# Altium PCB ESP-Now transceiver.PcbDoc
Units mm, origin at the board's own origin, x right, y up, seen from the top; angles counter-clockwise.
Board outline 65.02 x 100 mm, 2 copper layers (Top Layer, Bottom Layer); 54 components, 46 nets, 224 pads, 89 vias.
Unrouted connection lines stored in the file: 1.
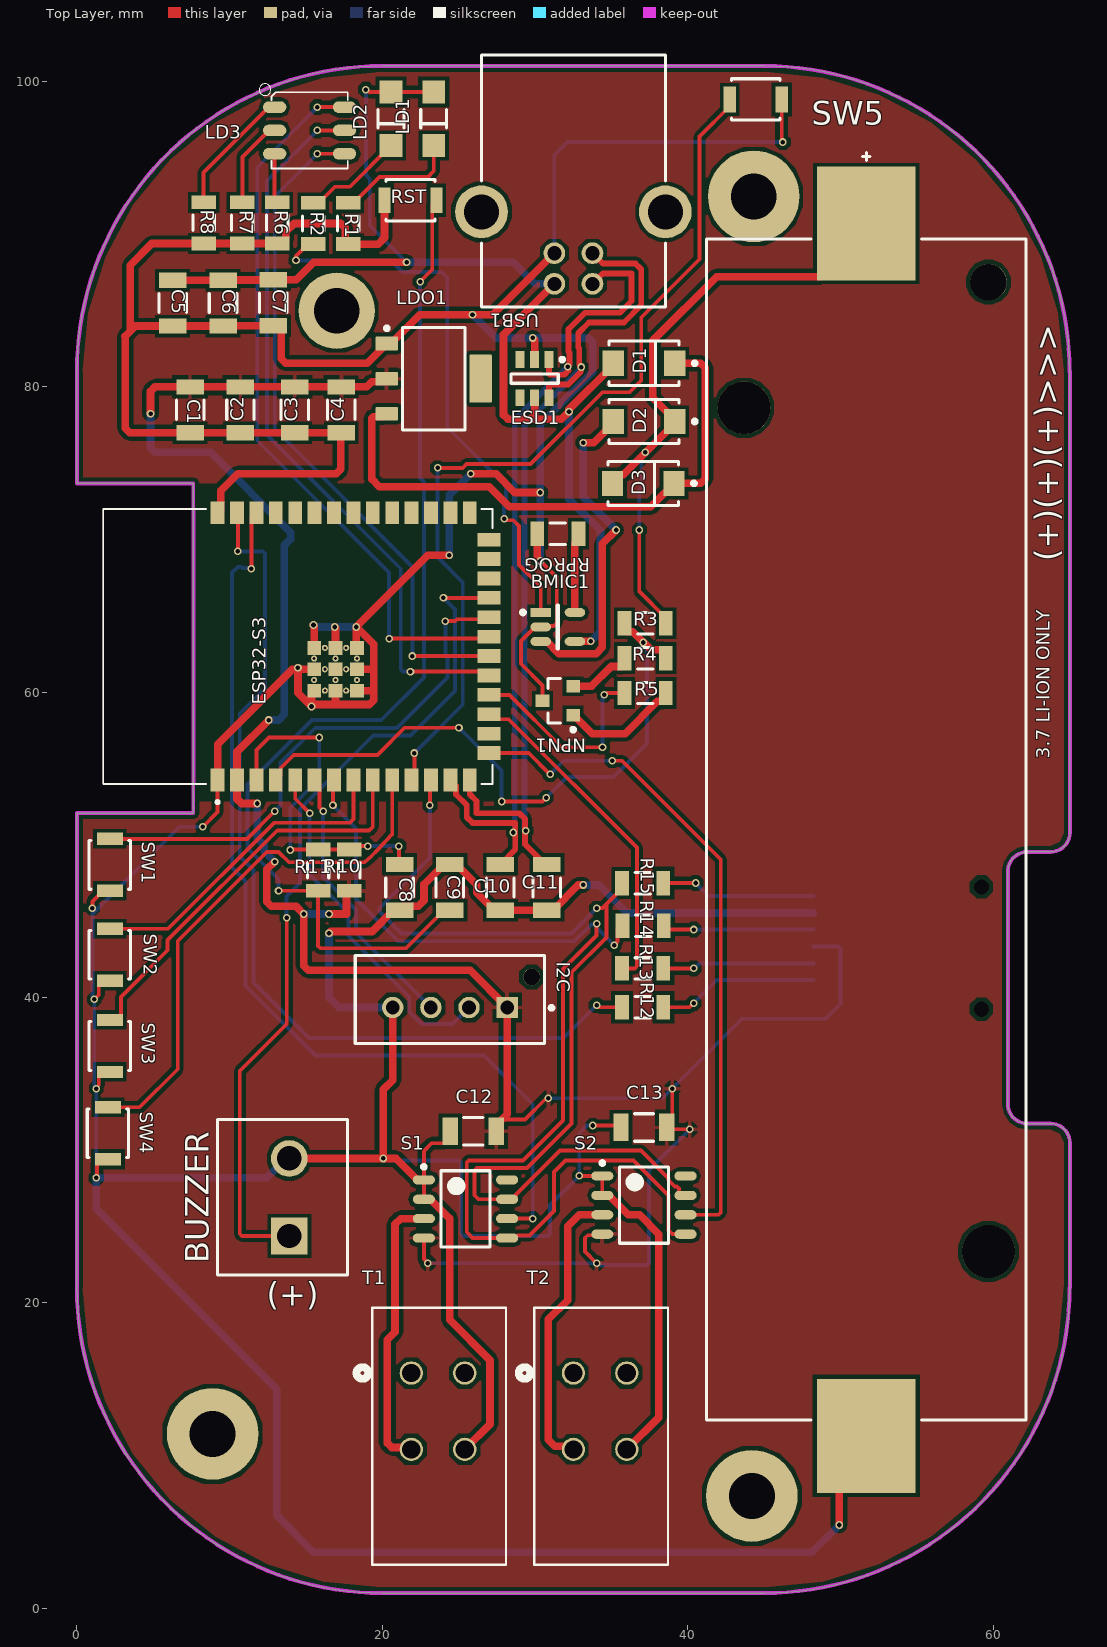
[diagram p0: Top Layer view]
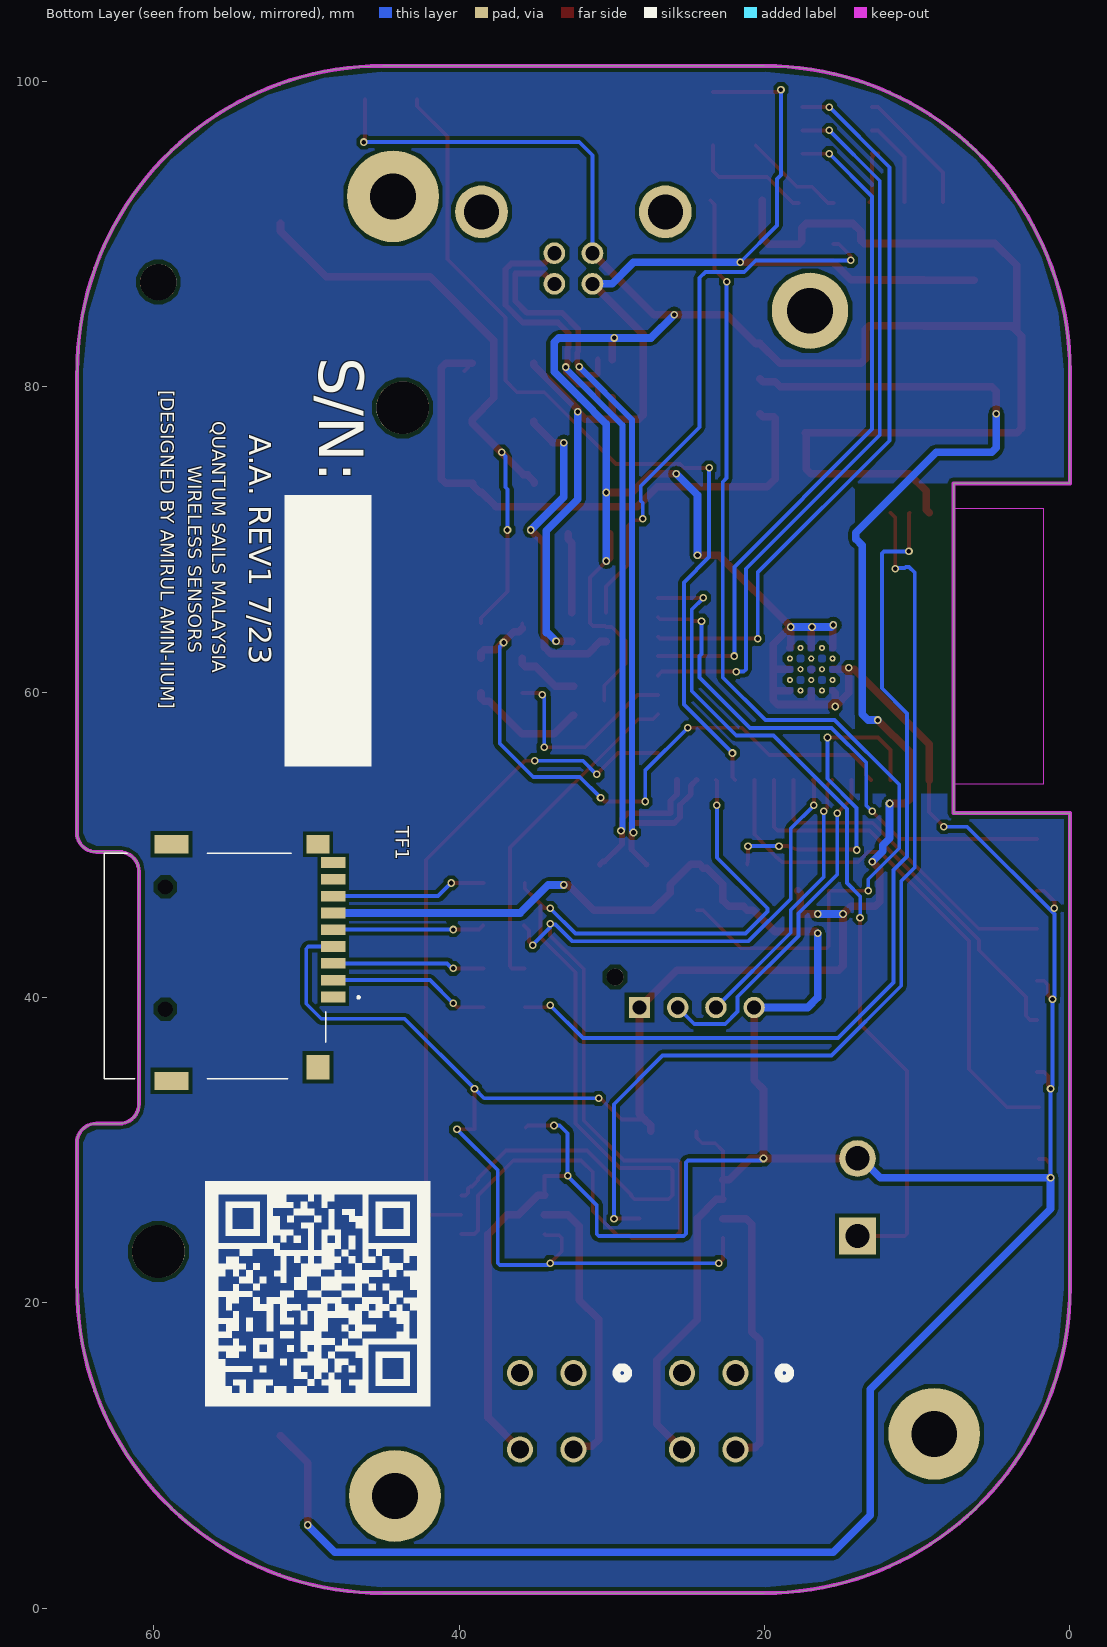
[diagram p1: Bottom Layer view, seen from below]
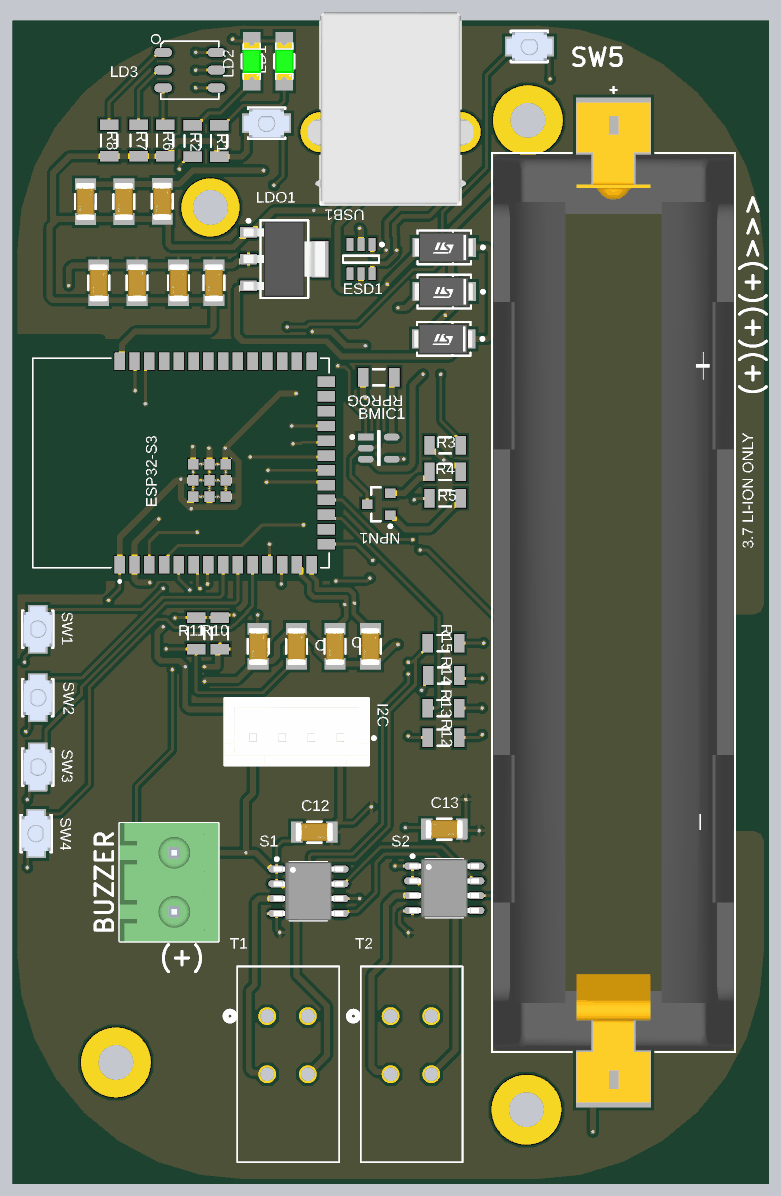
[diagram p2: 3D render of the assembled board from above, using the file's embedded part models]

## Layer stack, top to bottom
Top Solder: solder mask 0.0102, Solder Resist, Dk 3.5
Top Layer: signal copper 0.0356
Dielectric 1: dielectric 0.32, FR-4, Dk 4.8
Bottom Layer: signal copper 0.0356
Bottom Solder: solder mask 0.0102, Solder Resist, Dk 3.5

## Board outline
0,52.07 7.62,52.07 7.62,73.66 0,73.66 0,81 cw(c20,81) 20,101 45,101 cw(c45,81) 65,81 65.024,80.976 65.024,50.8 cw(c63.754,50.8) 63.754,49.53 62.23,49.53 ccw(c62.23,48.26) 60.96,48.26 60.96,33.02 ccw(c62.23,33.02) 62.23,31.75 63.754,31.75 cw(c63.754,30.48) 65.024,30.48 65.024,29.21 65.024,21.024 65,21 cw(c45,21) 45,1 45.01,1 20,1 cw(c20,21) 0,21

## Design rules (kind name [scope] priority, off if disabled: settings)
BoardOutlineClearance [All] p1: gap=0.254 ignorepadtopadclearanceinfootprint=FALSE
Clearance [All] p1: gap=0.254 ignorepadtopadclearanceinfootprint=FALSE except(0: Arc-Hole Track-Hole SMDPad-Hole THPad-Hole Via-Hole Fill-Hole Poly-Hole Region-Hole Text-Hole)
DiffPairsRouting [All] p1: maxlimit=0.254 minlimit=0.254 mostfreqgap=0.254 toplayer_minwidth=0.381 toplayer_maxwidth=0.381 toplayer_prefwidth=0.381 bottomlayer_minwidth=0.381 bottomlayer_maxwidth=0.381 bottomlayer_prefwidth=0.381 maxuncoupledlength=12.7
PolygonConnect [All] p1: connectstyle=Relief reliefconductorwidth=0.254 reliefentries=4 polygonreliefangle="90 Angle" airgapwidth=0.254
RoutingVias [All] p1: holewidth=0.3 width=0.5 viastyle="Through Hole" minholewidth=0.3 minwidth=0.5 maxholewidth=0.3 maxwidth=0.5
SolderMaskExpansion SolderMaskExpansion_1 [All] p1 off: expansion=0.102 istentingtop=FALSE
SolderMaskExpansion tentedVias [IsVia] p2: expansion=0.102 istentingtop=TRUE
Width [All] p1: maxlimit=1 minlimit=0.1 preferedwidth=0.254 minimp=50.000000 maximp=50.000000 favimp=50.000000
29 further rules are at their usual default settings.

## Classes and differential pairs
differential pair USB_D: +USB_D_P -USB_D_N

## Components (designator, comment, footprint, x,y, rotation, side; value= is the part's Value field where it differs from the comment)
"3.7 LI-ION ONLY" "1042P" FP-1042P-MFG 51.689,50.99 r90 top
BMIC1 "MCP73831T-2ACI/OT" FP-C04-091-OT-IPC_B 31.496,64.262 r0 top
BUZZER "691311500002" 691311500002 13.462,26.924 r90 top
C1 "22uF" FP-CC1206-1_25-MFG 7.412,78.48 r270 top value="100 nF"
C2 "0.1uF" FP-CC1206-1_25-MFG 10.714,78.48 r270 top value="100 nF"
C3 "0.1uF" FP-CC1206-1_25-MFG 14.27,78.48 r270 top value="100 nF"
C4 "0.1uF" FP-CC1206-1_25-MFG 17.318,78.48 r270 top value="100 nF"
C5 "22uF" FP-CC1206-1_25-MFG 6.269,85.465 r270 top value="100 nF"
C6 "0.1uF" FP-CC1206-1_25-MFG 9.571,85.465 r270 top value="100 nF"
C7 "0.1uF" FP-CC1206-1_25-MFG 12.873,85.489 r270 top value="100 nF"
C8 "TBD" FP-CC1206-1_25-MFG 21.128,47.214 r270 top value="100 nF"
C9 "0.1uF" FP-CC1206-1_25-MFG 24.43,47.214 r270 top value="100 nF"
C10 "TBD" FP-CC1206-1_25-MFG 27.732,47.214 r270 top value="100 nF"
C11 "TBD" FP-CC1206-1_25-MFG 30.78,47.214 r270 top value="100 nF"
C12 "0.1uF" FP-CC1206-1_25-MFG 25.954,31.236 r0 top value="100 nF"
C13 "0.1uF" FP-CC1206-1_25-MFG 37.13,31.49 r0 top value="100 nF"
D1 "STTH1L06A" FP-SMA-MFG 37.13,81.528 r180 top
D2 "STTH1L06A" FP-SMA-MFG 37.13,77.718 r180 top
D3 "STTH1L06A" FP-SMA-MFG 37.084,73.66 r180 top
ESD1 "SRV05-4.TCT" SMTC-SOT23-6_V 29.972,80.518 r270 top
ESP32-S3 "ESP32-S3-WROOM-1-N16R2" XCVR_ESP32-S3-WROOM-1-N16R2 14.478,62.992 r90 top
I2C "B4B-XH-AM (LF)(SN)" FP-B4B-XH-AM_LF_SN-MFG 24.43,39.872 r0 top
LD1 "PWR LED" FP-HSMG-C150-MFG 23.368,97.536 r90 top
LD2 "CHARGING LED" FP-HSMG-C150-MFG 20.574,97.536 r90 top
LD3 "SMD-RGB-HI-LIGHT(6P-L5.0*W5.0*H1.5MM)" LED6-SMD-5050 15.24,96.774 r0 top
LDO1 "LM1117MPX-3.3/NOPB" DCY0004A_L 23.368,80.518 r0 top
NPN1 "BC817-25LT1G" ONSC-SOT-23-3-318-08_V 31.496,59.436 r180 top
R1 "330" RESC3216X60X45LL10T20 17.774,90.679 r270 top
R2 "330" RESC3216X60X45LL10T20 15.488,90.679 r270 top
R3 "100k" RESC3216X60X45LL10T20 37.21,64.51 r0 top
R4 "10k" RESC3216X60X45LL10T20 37.21,62.224 r0 top
R5 "10k" RESC3216X60X45LL10T20 37.21,59.938 r0 top
R6 "330" RESC3216X60X45LL10T20 13.127,90.719 r270 top
R7 "330" RESC3216X60X45LL10T20 10.841,90.719 r270 top
R8 "330" RESC3216X60X45LL10T20 8.301,90.719 r270 top
R10 "TBD" RESC3216X60X45LL10T20 17.826,48.334 r90 top
R11 "0" RESC3216X60X45LL10T20 15.794,48.334 r90 top
R12 "3.3k" RESC3216X60X45LL10T20 37.05,39.364 r0 top
R13 "3.3k" RESC3216X60X45LL10T20 37.05,41.904 r0 top
R14 "3.3k" RESC3216X60X45LL10T20 37.084,44.704 r0 top
R15 "3.3k" RESC3216X60X45LL10T20 37.05,47.492 r0 top
RPROG "5k" RESC3216X60X45LL10T20 31.496,70.358 r0 top
RST "B3U-1000P" FP-B3U-1000P-MFG 21.844,92.202 r0 top
S1 "Component_1" SOIC127P600X175-8N 25.446,26.156 r0 top
S2 "Component_1" SOIC127P600X175-8N 37.13,26.41 r0 top
SW1 "B3U-1000P" FP-B3U-1000P-MFG 2.159,48.69 r90 top
SW2 "B3U-1000P" FP-B3U-1000P-MFG 2.159,42.799 r90 top
SW3 "B3U-1000P" FP-B3U-1000P-MFG 2.159,36.83 r90 top
SW4 "B3U-1000P" FP-B3U-1000P-MFG 2.032,31.115 r270 top
SW5 "B3U-1000P" FP-B3U-1000P-MFG 44.45,98.806 r0 top
T1 "2601-1102" CONN4_1-1102_WAG 21.9,15.414 r0 top
T2 "2601-1102" CONN4_1-1102_WAG 32.512,15.414 r0 top
TF1 "TF-115" TF115 54.878,42.288 r270 bottom
USB1 "Charger port" 61400416121 32.512,93.472 r180 top

## Footprints (in the part's own frame and the unit in brackets; to place one, negate y for a bottom-side part, rotate by r counter-clockwise, add the part's x,y. Pads: shape width x height; smd on the part's side, far side on the other; paste and mask are expansions set on the pad)
61400416121 [mm] "USB 2.0 Type B Horizontal"
  round 1.42 hole 0.92: 1(1.25,6.74) 2(-1.25,6.74) 3(-1.25,4.74) 4(1.25,4.74)
  round 3.45 hole 2.3: Shell(-6.02,2.03) Shell(6.02,2.03)
  silkscreen extent -6.02,-8.25 6.02,8.25, body extent -7.48,-8.25 7.48,8.25, height 11.08
691311500002 [mm] "5,08mm - PCB Headers - Vertical - Opened ends -02p"
  rect 2.4x2.4 hole 1.6: 1(-2.54,-0.45)
  round 2.4 hole 1.6: 2(2.54,-0.45)
  silkscreen extent -5.08,-4.25 5.08,4.25, body extent -5.08,-4.25 5.08,4.25, height 12.05
CONN4_1-1102_WAG [mil]
  round 60 / inner round 60 / far side round 67 hole 47 paste-33.5 mask+0: 1(0,0) 2(0,-196.85) 3(137.8,0) 4(137.8,-196.85)
  silkscreen extent -141,-495 244,168
DCY0004A_L [mm] "SOT223, 4-Leads, Body 6.7x3.7mm, Pitch 2.3mm, IPC High Density"
  rrect11% 1.45x0.9 smd: 1(-3.075,2.3) 2(-3.075,0) 3(-3.075,-2.3)
  rrect7% 1.45x3.15 smd: 4(3.075,0)
  silkscreen extent -3.2,-3.35 2.05,3.42, body extent -3.5,-3.25 3.5,3.25, height 1.62
FP-1042P-MFG [mil]
  rect 294x255 smd paste+0 mask+0: 1(-1562.5,0) 2(1562.5,0)
  round 135.83 hole 135.83 unplated paste-39370.1 mask+0: ""(-1087.5,-315) ""(1087.5,315)
  round 94 hole 94 unplated paste-39370.1 mask+0: ""(1411.5,-315)
  silkscreen extent -1522,-412 1745,412, body extent -1713,-415 1713,415, height 10
FP-B3U-1000P-MFG [mm]
  rect 0.8x1.7 smd paste+0 mask+0: 1(-1.7,0) 2(1.7,0)
  silkscreen extent -1.6,-1.35 1.6,1.35, body extent -2.2,-1.45 2.2,1.45, height 0.25
FP-B4B-XH-AM_LF_SN-MFG [mm]
  rect 1.4x1.4 hole 0.9 paste-1000 mask+0: 1(3.75,-0.525)
  round 1.4 hole 0.9 paste-1000 mask+0: 2(1.25,-0.525) 3(-1.25,-0.525) 4(-3.75,-0.525)
  round 1.1 hole 1.1 unplated paste-1000 mask+0: ""(5.35,1.475)
  silkscreen extent -6.2,-2.88 6.78,2.88, body extent -6.3,-2.98 6.3,2.98, height 0.25
FP-C04-091-OT-IPC_B [mm]
  rect 1.338x0.578 smd paste+0 mask+0: 1(-1.116,0.95)
  rrect100% 1.338x0.578 smd paste+0 mask+0: 2(-1.116,0) 3(-1.116,-0.95) 4(1.116,-0.95) 5(1.116,0.95)
  silkscreen extent -2.41,-1.45 0.05,1.45
FP-CC1206-1_25-MFG [mm]
  rect 1x1.8 smd paste+0 mask+0: 1(-1.5,0) 2(1.5,0)
  silkscreen extent -0.63,-0.9 0.63,0.9, body extent -2.2,-1.25 2.2,1.25, height 0.25
FP-HSMG-C150-MFG [mm]
  rect 1.5x1.5 smd paste+0 mask+0: 1(-1.75,0) 2(1.75,0)
  silkscreen extent -0.6,-0.85 0.6,0.85, body extent -2.6,-0.95 2.6,0.95, height 0.25
FP-SMA-MFG [mm]
  rect 1.4x1.64 smd paste+0 mask+0: 1(-2.015,0) 2(2.015,0)
  silkscreen extent -3.45,-1.45 2.3,1.45, body extent -2.82,-1.55 2.82,1.55, height 0.25
LED6-SMD-5050 [mil]
  oval 60x30 smd: 1(-90,60) 2(-90,0) 3(-90,-60) 4(90,-60) 5(90,0) 6(90,60)
  silkscreen extent -130,-98 98,120
ONSC-SOT-23-3-318-08_V [mm] "SOT23, 3-Leads, Body 2.92x1.3mm, Pitch 0.95mm"
  rect 0.9x0.8 smd: 1(-1,0.95) 2(-1,-0.95) 3(1,0)
  silkscreen extent -1.13,-1.46 0.65,2.02, body extent -0.65,-1.46 0.65,1.46, height 1.11
RESC3216X60X45LL10T20 [mm] "Chip Resistor, 2-Leads, Body 3.20x1.60mm, IPC High Density"
  rect 0.9x1.6 smd: 1(-1.35,0) 2(1.35,0)
  silkscreen extent -0.5,-0.7 0.5,0.7, body extent -1.65,-0.85 1.65,0.85, height 0.6
SMTC-SOT23-6_V [mm] "SOT23, 6-Leads, Body 3.15x1.7mm, Pitch 0.95mm"
  rect 1.1x0.6 smd: 1(-1.25,0.95) 2(-1.25,0) 3(-1.25,-0.95) 4(1.25,-0.95) 5(1.25,0) 6(1.25,0.95)
  silkscreen extent -1.37,-1.55 0.3,1.93, body extent -0.87,-1.55 0.87,1.55, height 1.45
SOIC127P600X175-8N [mm] "SOIC, 8-Leads, Body 4.90x3.90mm, Pitch 1.27mm, IPC Medium Density"
  oval 1.45x0.6 smd: 1(-2.725,1.905) 2(-2.725,0.635) 3(-2.725,-0.635) 4(-2.725,-1.905) 5(2.725,-1.905) 6(2.725,-0.635) 7(2.725,0.635) 8(2.725,1.905)
  silkscreen extent -2.85,-2.5 1.6,2.88, body extent -3,-2.5 3,2.5, height 1.75
TF115 [mm]
  rect 0.7x1.6 smd: 1(2.25,6.65) 2(1.15,6.65) 3(0.05,6.65) 4(-1.05,6.65) 5(-2.15,6.65) 6(-3.25,6.65) 7(-4.35,6.65) 8(-5.45,6.65) CD1(-6.55,6.65)
  round 0.5 hole 1 unplated: MH1(3.05,-4.35) MH2(-4.95,-4.35)
  rect 1.6x1.5 smd: MP1(6.85,5.65)
  rect 1.2x1.5 smd: MP2(-7.75,5.65)
  rect 1.2x2.2 smd: MP3(-7.75,-3.95) MP4(7.75,-3.95)
  silkscreen extent -7.15,-8.35 7.6,8.35
XCVR_ESP32-S3-WROOM-1-N16R2 [mm]
  rect 1.5x0.9 smd: 1(-8.75,5.26) 2(-8.75,3.99) 3(-8.75,2.72) 4(-8.75,1.45) 5(-8.75,0.18) 6(-8.75,-1.09) 7(-8.75,-2.36) 8(-8.75,-3.63) 9(-8.75,-4.9) 10(-8.75,-6.17) 11(-8.75,-7.44) 12(-8.75,-8.71) 13(-8.75,-9.98) 14(-8.75,-11.25) 27(8.75,-11.25) 28(8.75,-9.98) 29(8.75,-8.71) 30(8.75,-7.44) 31(8.75,-6.17) 32(8.75,-4.9) 33(8.75,-3.63) 34(8.75,-2.36) 35(8.75,-1.09) 36(8.75,0.18) 37(8.75,1.45) 38(8.75,2.72) 39(8.75,3.99) 40(8.75,5.26)
  rect 0.9x1.5 smd: 15(-6.985,-12.5) 16(-5.715,-12.5) 17(-4.445,-12.5) 18(-3.175,-12.5) 19(-1.905,-12.5) 20(-0.635,-12.5) 21(0.635,-12.5) 22(1.905,-12.5) 23(3.175,-12.5) 24(4.445,-12.5) 25(5.715,-12.5) 26(6.985,-12.5)
  rect 0.9x0.9 smd: 41_1(-1.5,-2.46) 41_2(-2.9,-2.46) 41_3(-0.1,-2.46) 41_4(-2.9,-3.86) 41_5(-1.5,-3.86) 41_6(-0.1,-3.86) 41_7(-2.9,-1.06) 41_8(-1.5,-1.06) 41_9(-0.1,-1.06)
  round 0.4 hole 0.2 mask+0: 41_10(-1.5,-1.76) 41_11(-2.9,-1.76) 41_12(-0.1,-1.76) 41_13(-2.9,-3.16) 41_14(-1.5,-3.16) 41_15(-0.1,-3.16) 41_16(-2.2,-1.06) 41_17(-0.8,-1.06) 41_18(-2.2,-2.46) 41_19(-0.8,-2.46) 41_20(-2.2,-3.86) 41_21(-0.8,-3.86)
  Keep-Out Layer region: 9,6.75 -9,6.75 -9,12.75 9,12.75
  Keep-Out Layer region: 9,6.75 -9,6.75 -9,12.75 9,12.75
  silkscreen extent -10.3,-12.75 9,12.75

## Part data
"3.7 LI-ION ONLY": library part CMP-19636-000019-1, "BATTERY HOLDER 18650 SMD TAB", Max Operating Temperature=145°C, Min Operating Temperature=-50°C, Package Quantity=200, Lead Free="Lead Free", Mount="Surface Mount", Number of Cells=1, Packaging=Tray, Termination=SMD/SMT
BMIC1: library part CMP-0133-00143-2, "IC CONTROLLR LI-ION 4.2V SOT23-5", Case/Package=SOT-23, Drain to Source Resistance=350mR, Max Charge Current=500mA, Max Input Voltage=6V, Max Operating Temperature=85°C, Max Output Voltage=4.5V, Max Power Dissipation=1.54W, Min Operating Temperature=-40°C, Min Output Voltage=4.168V, Min Supply Voltage=3.75V, Output Voltage=4.2V, Voltage Rating=4.534V, Contact Plating=Tin, Height=0.051inch, Lead Free="Lead Free", Length=0.122inch, Max Supply Voltage=6V, Mount="Surface Mount", Number of Cells=1, Number of Channels=1, Number of Outputs=1, Number of Pins=5, Output Current=500mA, Packaging="Tape and Reel", Radiation Hardening=No, REACH SVHC="No SVHC", Termination=SMD/SMT, Weight=0.00709oz, Width=0.071inch
BUZZER: library part CMP-1502-02123-1, "Serie 311 - 5.08mm Open Vertical PCB Header WR-TBL, 2 pin", Manufacturer="Wurth Elektronik", Operating Temperature=-40to105degC, Datasheet URL=http://katalog.we-online.de/em/datasheet/6913115000xx.pdf, Gender=Male, Manufacturer URL=http://www.we-online.de, Mounting Technology=THT, Package Reference=691311500002, Packaging=Box, Part Number=691311500002, Pin Number=2, Pitch=5.08mm, Publisher=WurthElektronik
C1 C2 C3 C4 C5 C6 C7 C8 C9 C10 C11 C12 C13: library part CMP-03422-000842-1, "CAP CER 0.1UF 50V X7R 1206", Capacitance="100 nF", Manufacturer=Yageo, Manufacturer Part Number=CC1206KRX7R9BB104, Package=CC1206-1.25, Temperature="-55°C to +125°C", Temperature Characteristic=X7R, Temperature Coefficient=15%, Temperature Range High=+125°C, Temperature Range Low=-55°C, Tolerance=0.1, Voltage Rating="50 V", Automotive=No, Automotive Grade=NA, Category=Cap, ComponentLink2Description=Datasheet, ComponentLink2URL=http://www.yageo.com/documents/recent/UPY-NP0X7R_HV_1KV-to-3KV_11.pdf, Device Class L1="Passive Components", Device Class L2=Capacitors, Device Class L3="Ceramic Capacitors", Digikey Description="CAP CER 0.1UF 50V X7R 1206", Footprint Url=http://www.yageo.com/exep/pages/download/literatures/UPY-C_GEN_24.pdf, Height=1.45mm, Lead Free=Yes, Material=Ceramic, Mouser Description="Multilayer Ceramic Capacitors MLCC - SMD/SMT 100nF 50V X7R 10%", Octopart=https://octopart.com/cc1206krx7r9bb104-yageo-39467816, RoHS=TRUE
D1 D2 D3: library part CMP-12188-000002-1, "DIODE GEN PURP 600V 1A SMA", Forward Current=1A, Manufacturer=STMicroelectronics, Max Junction Temp=+175°C, Max Repetitive Reverse Voltage=600V, Max Surge Forward Current=20A, Package=SMA, Peak Reverse Current=1uA, Temperature="to +175°C", Automotive=No, Category=Diode, ComponentLink2Description=Datasheet, ComponentLink2URL=https://www.st.com/content/ccc/resource/technical/document/datasheet/e9/c2/09/e3/32/47/44/bd/CD00002694.pdf/files/CD00002694.pdf/jcr:content/translations/en.CD00002694.pdf, Device Class L1="Discrete Semiconductors", Device Class L2=Diodes, Device Class L3="Rectifier Diodes", Digikey Description="DIODE GEN PURP 600V 1A SMA", Height=2.65mm, Lead Free=Yes, Manufacturer Part Number=STTH1L06A, Mouser Description="DIODE GEN PURP 600V 1A SMA", Octopart=https://octopart.com/stth1l06a-stmicroelectronics-324385, RoHS=TRUE, Standoff Height=0.05mm, Temperature Range High=+175°C
ESD1: library part CMP-2000-05358-1, "RailClamp(R) Low Capacitance TVS Diode Array, 5 pF, 17.5 VC, -55 to 125 degC, 6-Pin SOT23, RoHS, Tape and Reel", Capacitance Value=5pF, Clamping Voltage=17.5V, Clamping Voltage (Max)=12.5V, Leakage Current=5uA, Manufacturer=Semtech, Operating Temp Range=-55Cto125C, Operating Temperature Classification=Military, Operating Temperature Max Deg. C=125C, Operating Temperature Min Deg. C=-55C, Package / Case=SOT-23, Package Description="6-Pin Small Outline Transistor, Body 2.9 x 1.6 mm, Pitch 0.95 mm", Package Reference=SOT23-6, Peak Pulse Current=12A, Peak Pulse Power Dissipation=300W, Reverse Breakdown Voltage=6V, Reverse Stand-off Voltage=5V, Test Current (It)=1mA, Configuration=Quad, Datasheet URL=https://datasheet.ciiva.com/8029/srv05-4-8029973.pdf, Datasheet Version=Jan-08, Direction Type=Uni-Directional, Leakage Current (Max)=5uA, Manufacturer URL=http://www.semtech.com/, Mounting=SurfaceMount, Mounting Style=SurfaceMount, Number of Elements=1, Packaging=TapeandReel, Pin Count=6, Polarity=Uni-Directional, Product Depth (mm)=1.6mm, Product Height (mm)=1.15mm, Product Length (mm)=2.9mm, Rad Hardened=No, Suppressor Type=DiodeArrays, Working Voltage=5V, Working Voltage (Max)=5V
ESP32-S3: "Bluetooth, WiFi 802.11b/g/n, Bluetooth v5.0 Transceiver Module 2.4GHz PCB Trace Surface Mount", Package=None, Availability="In Stock", Check_prices=https://www.snapeda.com/parts/ESP32-S3-WROOM-1-N16R2/Espressif+Systems/view-part/?ref=eda, MF="Espressif Systems", MP=ESP32-S3-WROOM-1-N16R2, Price=None, Purchase-URL=https://pricing.snapeda.com/search/part/ESP32-S3-WROOM-1-N16R2/?ref=eda, SnapEDA_Link=https://www.snapeda.com/parts/ESP32-S3-WROOM-1-N16R2/Espressif+Systems/view-part/?ref=snap
I2C: library part CMP-17439-000117-1, "CONN HEADER VERT 4POS 2.5MM", Color=Green, Contact Resistance=20mR, Flammability Rating="UL94 V-0", Housing Color=White, Insulation Color=Natural, Max Current Rating=3A, Max Operating Temperature=85°C, Max Voltage Rating (AC)=250V, Min Operating Temperature=-25°C, Connector Type=Header, Contact Finish - Mating=TIN, Contact Material=Brass, Contact Plating=Copper, Contact Shape=Square, Contact Type="Male Pin", Depth=5.75mm, Fastening Type=Detent, Gender=Male, Housing Material=Polyamide, Insulation Material=Nylon, Lead Free="Lead Free", Length=12.4mm, Mated Stacking Heights=9.8mm, Mount="Through Hole", Number of Pins=4, Number of Positions=4, Number of Rows=1, Orientation=Straight, Packaging=Bulk, Pitch=2.5mm, Series=XH, Termination=Solder, Voltage Rating=250V
LD1 LD2: library part CMP-2000-05061-2, "LED GREEN DIFFUSED 1206 SMD", Colour=Green, Forward Current=20mA, Forward Voltage=2.2V, Manufacturer=Broadcom, Manufacturer Part Number=HSMG-C150, Max Junction Temp=+95°C, Power Dissipation=65mW, Reverse Voltage=5V, Temperature="-40°C to +85°C", Temperature Range High=+85°C, Temperature Range Low=-40°C, Automotive=No, Category=Diode, ComponentLink2Description=Datasheet, ComponentLink2URL=https://docs.broadcom.com/docs/AV02-0551EN, Device Class L1=Optoelectronics, Device Class L2=LEDs, Device Class L3=unset, Digikey Description="LED GREEN DIFFUSED 1206 SMD", Height=1.2mm, Ipc Land Pattern Name=DIOCP320160X55, Lead Free=Yes, Led Orientation="Top View", Luminous Intensity=15mcd, Mouser Description="LED Uni-Color Green 570nm 2-Pin Chip LED T/R", Octopart=https://octopart.com/hsmg-c150-broadcom-71131304, Package=HSMG-C150, Peak Emmision Wavelength=570nm, RoHS=TRUE, Viewing Angle=170°, Wavelength=572nm
LD3: "Addressable Lighting - 1 LED Discrete PWM Red, Green, Blue (RGB) 5.00mm L x 5.00mm W", Package="SparkFun Electronics", Availability="Not in stock", Check_prices=https://www.snapeda.com/parts/5050RGB/SparkFun+Electronics/view-part/?ref=eda, MF="SparkFun Electronics", MP=5050RGB, Price=None, SnapEDA_Link=https://www.snapeda.com/parts/5050RGB/SparkFun+Electronics/view-part/?ref=snap
LDO1: library part CMP-0062-01639-4, "800mA Low-Dropout Linear Regulator, 4-pin SOT-223, Pb-Free", Manufacturer="Texas Instruments", PackageTopMarking=XYTT*N05A, PowerWise=N, Code_IPC=SOT223-4, Code_JEDEC=TO-261-AA, ComponentLink1Description="Datasheet URL", ComponentLink1URL=http://www.ti.com/general/docs/lit/getliterature.tsp?genericPartNumber=LM1117-N&fileType=pdf, CompType="LDO IC", High-Reliability=Y, PackageDescription="Molded SOT-223, 6.50 x 3.56 x 1.6mm Body, 4 Lead, 2.3mm Pitch", PackageReference=DCY0004A, PartNumber=LM1117MPX-3.3/NOPB, PinCount=4, RoHS=Y
NPN1: library part CMP-1048-00737-1, "General Purpose Transistor, NPN Silicon, 3-Pin SOT-23, Pb-Free, Tape and Reel", Manufacturer="On Semiconductor", ComponentLink1Description="Manufacturer URL", ComponentLink1URL=http://www.onsemi.com/, ComponentLink2Description=Datasheet, ComponentLink2URL=http://www.onsemi.com/pub_link/Collateral/BC817-16LT1-D.PDF, ComponentLink3Description="Package Specification", ComponentLink3URL=http://www.onsemi.cn/pub_link/Collateral/318-08.PDF, DatasheetVersion="Rev. 12", fT Min (MHz)=100, IC Continuous (A)=0.5, Mounting Technology="Surface Mount", PackageDescription="3-Pin Small Outline Transistor, Body 2.92 x 1.3 mm, Pitch 0.95 mm", PackageReference=SOT-23-3-318-08, PackageVersion="Rev. AP, 11/2009", Packing="Tape and Reel", PartNumber=BC817-25LT1G, Polarity=NPN, RoHS=TRUE
R1 R2 R3 R4 R5 R6 R7 R8 R10 R11 R12 R13 R14 R15 RPROG: library part CMP-2003-02213-1, Manufacturer="Vishay Dale", Part Number=CRCW120647K0FKEA
RST SW1 SW2 SW3 SW4 SW5: library part CMP-2100-03586-2, "SWITCH TACTILE SPST-NO 0.05A 12V", Contact Current Rating=50mA, Contact Resistance=100mR, Insulation Resistance=100MR, Max Operating Temperature=70°C, Max Voltage Rating (DC)=12V, Min Operating Temperature=-25°C, Operating Force=1.5N, Package Quantity=1, Ratings="Dust Proof", Actuator Length=0.4mm, Actuator Type=Standard, Contact Material=Silver, Current Rating=50mA, Depth=2.5mm, Electrical Life=200000Cycles, Height=1.2mm, Illumination Type=Non-Illuminated, Lead Free="Lead Free", Length=4mm, Max Current Rating=50mA, Mechanical Life=200000Cycles, Mount="Surface Mount", Orientation=Straight, Packaging="Tape and Reel", Switch Function=Off-Mom, Switch Travel=0.15mm, Termination=SMD/SMT, Throw Configuration=SPST, Voltage Rating (DC)=12V, Weight=0.000776oz, Width=3mm
T1 T2: "No Description Available", Mfr_Name=Wago, RefDes=RefDes, Type="Wire to Board"
TF1: "Connector - Card Sockets 8 14.5x14.75x1.85mm RoHS", Manufacturer_Name=XUNPU, Datasheet Link=https://datasheet.lcsc.com/szlcsc/XUNPU-TF-115_C266620.pdf, Geometry.Height=2mm, Manufacturer_Part_Number=TF-115
USB1: library part CMP-1502-03243-1, "USB 2.0 Type B Receptacle WR-COM, Horizontal, THT, with Pads and Pegs", Contact Resistance=20mOhm, Manufacturer="Wurth Elektronik", Operating Temperature=-40to105degC, Package Reference=61400416121, Rated Current=1.5A, Working Voltage=30VAC, Connector Type=USB2.0TypeB, Datasheet URL=https://katalog.we-online.de/em/datasheet/61400416121.pdf, Gender=Receptacle, Manufacturer URL=http://www.we-online.de, Mounting Technology=THT, Orientation=Horizontal, Packaging=Tray, Part Number=61400416121, Publisher=WurthElektronik

## Free pads (board coordinates)
  round 6 hole 3: SC(8.89,11.43) SC(44.196,7.366) SC(44.323,92.456)
  round 5 hole 3: SC(17.018,84.963)

## Via types
v1: diameter 0.5, hole 0.3, Top Layer to Bottom Layer, tented both sides, 89 vias

## Nets (pads, with @x,y where several pads share a name; then routed paths per layer and width w, separated by ;. In a path a pad name is that pad's centre, name@x,y a point inside that pad or via, vN(x,y) a via of type N, cw(c..) or ccw(c..) an arc to the next point about the centre after c; other vN are vias at no path point)
3V3: C1.1 C2.1 C3.1 C4.1 C12.2 C13.2 ESP32-S3.2 I2C.1 LDO1.2 R10.1 S1.4 S2.4 TF1.4 | length 156.2
  Top Layer w0.25: S1.4 22.721,22.872 v1(22.987,22.606) ; C12.2@27.829,32.011 29.344,32.011 30.734,33.401 v1(30.861,33.401) ; v1(34.036,22.606) 33.274,23.368 33.274,24.257 33.455,24.438 34.338,24.438 S2.4 ; v1(38.989,34.036) 38.989,31.385 39.005,31.369 v1(40.132,31.369)
  Top Layer w0.5: v1(4.826,78.232) 4.826,79.687 5.119,79.98 C1.1 C2.1 C3.1 C4.1 18.968,79.98 19.306,80.318 20.093,80.318 LDO1.2 ; v1(11.811,52.705) 10.781,52.705 10.488,52.998 ESP32-S3.2 10.488,56.081 v1(12.573,58.166) ; v1(12.951,48.892) 12.446,48.387 12.446,46.267 12.739,45.974 14.351,45.974 v1(14.859,45.466) 14.859,42.076 15.152,41.783 25.744,41.783 I2C.1 28.18,32.362 27.829,32.011 27.454,31.636 C12.2 ; v1(16.51,45.466) 17.653,45.466 17.653,46.811 R10.1
  Bottom Layer w0.25: v1(22.987,22.606) v1(34.036,22.606) 34.163,22.479 37.319,22.479 37.465,22.625 37.465,28.702 v1(40.132,31.369) ; v1(30.861,33.401) 38.354,33.401 v1(38.989,34.036) 43.561,38.608 49.022,38.608 50.007,39.593 50.007,43.192 49.861,43.338 TF1.4
  Bottom Layer w0.5: v1(4.826,78.232) 4.826,75.985 5.119,75.692 8.763,75.692 14.017,70.438 14.017,70.024 13.589,69.596 13.589,58.547 13.208,58.166 v1(12.573,58.166) ; v1(11.811,52.705) 11.811,50.422 12.262,49.971 12.262,49.58 v1(12.951,48.892) ; v1(14.859,45.466) v1(16.51,45.466)
5V: BMIC1.4 C5.1 C6.1 C7.1 D1.2 ESD1.5 LD1.2 LD2.2 USB1.1 | length 80.5
  Top Layer w0.25: v1(18.923,99.441) 18.991,99.441 19.146,99.286 LD2.2
  Top Layer w0.254: LD2.2 LD1.2
  Top Layer w0.5: C5.1 C6.1 9.583,86.977 12.861,86.977 C7.1 14.357,86.989 15.506,88.138 v1(21.588,88.138) ; ESD1.5 29.972,78.144 29.679,77.851 ; USB1.1 27.94,83.41 27.94,78.144 28.233,77.851 29.679,77.851 ; v1(32.226,78.353) 31.723,77.851 29.679,77.851 ; v1@32.226,78.519 35.115,81.408 D1.2 ; BMIC1.4 32.627,63.327 v1(33.648,63.327)
  Bottom Layer w0.25: v1(18.923,99.441) 18.923,93.853 19.177,93.599 19.177,90.549 v1(21.588,88.138)
  Bottom Layer w0.5: v1(21.588,88.138) 28.575,88.138 29.981,86.732 USB1.1 ; v1(32.226,78.353) 32.226,72.626 34.29,70.562 34.29,63.881 34.202,63.881 v1(33.648,63.327)
BAT%: ESP32-S3.4 R3.1 R4.2 | length 41.5
  Top Layer w0.25: ESP32-S3.4 13.353,54.567 13.353,55.033 14.2,55.88 19.685,55.88 21.463,57.658 v1(25.019,57.658) ; v1(27.813,52.832) 30.48,52.832 v1(30.734,53.086) ; R3.1@35.86,64.16 R3.1
  Top Layer w0.5: R3.1@35.86,64.16 36.06,63.96 36.41,63.96 37.596,62.774 38.36,62.774 38.56,62.574 R4.2
  Bottom Layer w0.25: v1(25.019,57.658) 27.813,54.864 v1(27.813,52.832) ; v1(30.734,53.086) 32.091,54.443 35.139,54.443 37.338,56.642 37.338,62.992 v1(37.084,63.246)
BAT-EN: ESP32-S3.18 R5.1 | length 13.7
  Top Layer w0.254: ESP32-S3.18 28.321,59.817 31.75,56.388 v1(34.417,56.388) ; v1(34.544,59.817) 34.611,59.817 34.732,59.938 R5.1
  Bottom Layer w0.254: v1(34.417,56.388) 34.417,59.69 v1(34.544,59.817)
BattIN: D1.1 D3.1 LDO1.3 | length 38.6
  Top Layer w0.254: D1.1 D1.1@39.647,81.026
  Top Layer w0.5: LDO1.3 20.093,78.018 19.397,78.018 19.304,77.925 19.304,73.953 19.809,73.448 27.009,73.448 28.321,72.136 37.575,72.136 38.529,73.09 38.649,73.09 39.099,73.54 D3.1 40.861,73.66 41.154,73.953 41.154,81.235 40.861,81.528 D1.1
BUZZER: BUZZER.1 ESP32-S3.23 | length 55.5
  Top Layer w0.25: v1(13.746,45.22) 13.746,38.257 10.668,35.179 10.668,24.53 10.814,24.384 BUZZER.1 ; v1(24.003,66.167) ESP32-S3.23
  Bottom Layer w0.25: v1(13.746,45.22) 13.733,45.233 13.733,46.625 14.605,47.497 14.605,52.34 19.413,57.148 21.844,57.148 24.763,60.067 24.763,65.407 v1(24.003,66.167)
CS-SD: ESP32-S3.39 R12.1 | length 60.1
  Top Layer w0.254: ESP32-S3.39 10.541,71.689 v1(10.541,69.215) ; v1(34.036,39.497) 34.169,39.364 R12.1
  Bottom Layer w0.254: v1(10.541,69.215) 12.166,69.215 12.315,69.066 12.315,60.246 10.668,58.599 10.668,49.242 11.557,48.353 11.557,40.977 15.196,37.338 31.877,37.338 v1(34.036,39.497)
CS-T1: ESP32-S3.38 S1.6 | length 63.9
  Top Layer w0.254: v1(11.43,68.072) 11.435,68.077 11.435,71.419 ESP32-S3.38 ; S1.6 v1(29.851,25.521)
  Bottom Layer w0.254: v1(11.43,68.072) 11.383,68.119 10.831,68.119 10.751,68.199 10.541,68.199 10.16,67.818 10.16,48.514 11.049,47.625 11.049,40.767 15.621,36.195 26.67,36.195 29.851,33.014 v1(29.851,25.521)
CS-T2: ESP32-S3.15 S2.6 | length 44.3
  Top Layer w0.25: ESP32-S3.15 29.591,56.007 v1(30.988,54.61)
  Top Layer w0.254: v1(35.052,55.499) 35.687,55.499 42.164,49.022 42.164,25.924 42.015,25.775 S2.6
  Bottom Layer w0.25: v1(30.988,54.61) 31.877,55.499 v1(35.052,55.499)
EN: C8.1 ESP32-S3.3 R10.2 R11.2 | length 22.9
  Top Layer w0.254: ESP32-S3.3 11.758,56.208 12.573,57.023 v1(15.875,57.023) ; v1(13.97,49.657) 13.997,49.684 R11.2 R10.2 18.499,49.911 v1(19.05,49.911) ; v1(21.082,49.911) 21.082,49.087 C8.1
  Bottom Layer w0.254: v1(13.97,49.657) 13.97,52.421 15.875,54.326 v1(15.875,57.023) ; v1(19.05,49.911) v1(21.082,49.911)
GND: "3.7 LI-ION ONLY.1" BMIC1.2 BUZZER.2 C1.2 C2.2 C3.2 C4.2 C5.2 C6.2 C7.2 C8.2 C9.1 C10.2 C11.2 C12.1 C13.1 ESD1.2 ESP32-S3.1 ESP32-S3.40 ESP32-S3.41_1 ESP32-S3.41_2 ESP32-S3.41_3 ESP32-S3.41_4 ESP32-S3.41_5 ESP32-S3.41_6 ESP32-S3.41_7 ESP32-S3.41_8 ESP32-S3.41_9 I2C.4 LDO1.1 NPN1.3 R1.2 R6.2 R7.2 R8.2 RPROG.1 RST.1 S1.1 S1.2 S2.1 S2.2 SW1.1 SW2.1 SW3.1 SW4.2 SW5.2 T1.4 T2.4 TF1.6 USB1.4 | length 471
  Top Layer w0.25: S1.1 22.721,29.96 23.222,30.461 24.079,30.461 24.454,30.836 C12.1 ; v1(30.353,68.58) 31.428,67.505 31.428,64.53 31.223,64.325 30.443,64.325 BMIC1.2 30,64.262 29.083,63.345 29.083,61.849 30.496,60.436 NPN1.3 ; v1(32.893,28.321) 32.899,28.315 S2.1 ; v1(33.782,31.623) 35.497,31.623 C13.1 ; SW5.2 46.15,96.09 v1(46.228,96.012)
  Top Layer w0.254: v1(1.016,45.847) 1.016,46.297 1.709,46.99 SW1.1 ; v1(1.143,39.878) 1.436,40.171 1.436,40.826 1.709,41.099 SW2.1 ; v1(1.27,28.194) 1.309,28.233 1.309,29.142 1.582,29.415 SW4.2 ; 1.436,34.269 1.436,34.857 1.709,35.13 SW3.1 ; v1(8.255,51.181) 9.218,52.144 ESP32-S3.1 ; S1.2 S1.1 ; S2.2 S2.1
  Top Layer w0.5: 3.157,83.294 3.492,83.63 ; 3.175,83.186 3.175,77.273 3.468,76.98 C1.2 C2.2 C3.2 C4.2 17.272,76.934 17.272,74.588 16.979,74.295 10.541,74.295 9.418,73.172 9.418,71.942 ESP32-S3.40 ; ESP32-S3.1 9.218,56.589 14.121,61.492 ; BUZZER.2 v1(20.066,29.464) ; v1(14.478,61.595) v1@14.478,61.492 ; v1(15.494,64.389) 15.538,64.345 ESP32-S3.41_9 ; ESP32-S3.41_7 15.367,59.921 v1(15.367,59.055) ; ESP32-S3.41_8 v1@14.478,61.492 ; v1(16.51,44.196) 16.637,44.323 19.337,44.323 20.728,45.714 C8.2 21.378,45.964 22.342,45.964 22.733,46.355 22.733,47.417 23.78,48.464 24.003,48.464 24.253,48.714 C9.1 24.83,48.714 26.173,47.371 26.173,46.873 27.332,45.714 C10.2 C11.2 31.18,45.714 32.837,47.371 v1(33.147,47.371) ; v1(16.891,64.262) 16.938,64.215 ESP32-S3.41_3 ; ESP32-S3.41_1@16.914,61.468 ESP32-S3.41_1 ; ESP32-S3.41_2 16.938,59.229 16.891,59.182 ; ESP32-S3.41_4 19.41,60.092 19.431,60.071 ; ESP32-S3.41_5 19.328,61.492 19.431,61.595 ; ESP32-S3.41_6 18.288,62.942 v1(18.288,64.262) ; RST.1 20.144,89.74 19.733,89.329 R1.2 17.765,89.329 17.565,89.529 17.565,90.385 17.272,90.678 14.224,90.678 13.677,90.131 13.677,89.569 13.477,89.369 R6.2 R7.2 R8.2 4.914,89.369 3.492,87.948 3.492,83.63 ; I2C.4 20.68,34.591 20.066,33.977 v1(20.066,29.464) ; S1.2 23.146,26.791 24.41,25.527 24.41,18.897 27.051,16.256 27.051,12.065 T1.4 ; S1.1 22.296,28.061 20.893,29.464 v1(20.066,29.464) ; v1(24.384,68.961) 22.987,68.961 v1(18.288,64.262) ; v1(25.781,74.295) 27.451,74.295 28.683,73.064 v1(30.353,73.064) ; v1(29.845,83.185) 29.972,83.058 ESD1.2 ; RPROG.1 30.146,68.787 v1(30.353,68.58) ; USB1.4 27.239,84.709 v1(25.908,84.709) 22.459,84.709 20.568,82.818 LDO1.1 19.009,81.534 13.681,81.534 13.388,81.827 13.388,83.739 13.138,83.989 C7.2 12.861,83.977 9.583,83.977 C6.2 C5.2 3.828,83.965 3.492,83.63 ; S2.2 34.83,27.045 36.107,25.768 36.843,25.768 38.1,24.511 38.1,12.502 T2.4 ; v1(49.911,5.461) 49.911,9.525 51.689,11.303 ; v1@14.478,61.492 14.478,59.944 v1(15.367,59.055) ; v1(15.367,59.055) 15.494,59.182 16.891,59.182 ; 16.891,59.182 19.138,59.182 19.431,59.475 19.431,60.071 ; v1(18.288,64.262) 19.431,63.119 19.431,61.595 ; 19.431,60.071 19.431,61.595
  Bottom Layer w0.25: v1(20.066,29.464) 20.193,29.337 25,29.337 25.146,29.191 25.146,24.53 25.292,24.384 30.842,24.384 30.988,24.53 30.988,26.416 v1(32.893,28.321) 32.893,31.115 33.401,31.623 v1(33.782,31.623) ; USB1.4 31.262,95.143 32.131,96.012 v1(46.228,96.012)
  Bottom Layer w0.254: v1(1.27,28.194) v1(1.27,34.036) 1.27,34.103 1.143,34.23 v1(1.143,39.878) 1.143,39.945 1.016,40.072 1.016,45.466 6.731,51.181 v1(8.255,51.181)
  Bottom Layer w0.5: BUZZER.2 13.694,29.464 12.424,28.194 v1(1.27,28.194) 1.27,26.162 13.081,14.351 13.081,6.096 15.494,3.683 48.133,3.683 v1(49.911,5.461) ; v1(15.494,64.389) 15.621,64.262 v1(16.891,64.262) v1(18.288,64.262) ; v1(16.51,44.196) 16.51,40.005 17.168,39.347 I2C.4 ; v1(24.384,68.961) 24.384,72.898 v1(25.781,74.295) ; v1(25.908,84.709) 27.432,83.185 v1(29.845,83.185) 33.481,83.185 33.774,82.892 33.774,80.968 32.064,79.257 30.353,77.547 v1(30.353,73.064) v1(30.353,68.58) ; v1(33.147,47.371) 34.163,47.371 35.996,45.538 TF1.6
MISO: ESP32-S3.12 R15.1 S1.7 S2.7 | length 69.3
  Top Layer w0.254: v1(23.114,52.578) 23.114,54.168 ESP32-S3.12 ; v1(34.036,45.847) 34.044,45.855 34.413,45.855 34.931,46.373 35.7,47.142 R15.1 ; 34.671,46.113 34.671,43.942 32.385,41.656 32.385,31.75 29.464,28.829 26.184,28.829 26.035,28.68 26.035,27.051 26.295,26.791 28.502,26.791 28.751,27.04 28.751,27.091 31.632,29.972 36.928,29.972 38.749,28.151 38.749,28.033 39.148,27.634 39.266,27.634 39.415,27.485 39.415,27.205 39.575,27.045 S2.7
  Bottom Layer w0.254: v1(23.114,52.578) 23.114,49.149 19.809,45.844 19.809,45.634 21.247,44.196 32.385,44.196 v1(34.036,45.847)
MOSI: ESP32-S3.17 R13.1 | length 22.1
  Top Layer w0.25: ESP32-S3.17 27.303,58.222 28.266,58.222 36.671,49.816 36.671,42.05 36.525,41.904 R13.1
"Net3.7 LI-ION ONLY_2": "3.7 LI-ION ONLY.2" D2.1 D3.2 R3.2 | length 41.3
  Top Layer w0.25: v1(36.83,70.612) 36.83,66.59 38.56,64.86 R3.2
  Top Layer w0.5: D3.2 35.069,73.78 35.519,74.23 35.777,74.23 39.145,77.598 D2.1 39.145,77.838 37.719,79.264 37.719,83.019 41.894,87.194 48.7,87.194 51.689,90.183 51.689,90.678
  Bottom Layer w0.25: v1(36.83,70.612) 36.83,73.279 36.957,73.406 36.957,75.438 v1(37.211,75.692)
NetBMIC1_1: BMIC1.1 R2.2 | length 37
  Top Layer w0.25: v1(14.351,88.265) 14.351,88.542 15.138,89.329 R2.2 ; v1(27.975,71.341) 28.043,71.341 28.137,71.247 28.575,71.247 28.956,70.866 28.956,68.326 30.38,66.902 BMIC1.1
  Bottom Layer w0.25: v1(14.351,88.265) 20.572,88.265 21.328,87.509 23.87,87.509 24.257,87.122 24.257,77.343 28.1,73.5 28.1,72.516 27.975,72.391 v1(27.975,71.341)
NetBMIC1_3: BMIC1.3 D2.2 | length 21.8
  Top Layer w0.5: BMIC1.3 30.76,63.312 31.553,62.519 33.994,62.519 34.402,62.927 34.402,69.708 v1(35.306,70.612) ; v1(33.147,76.327) 33.844,76.327 35.115,77.598 D2.2
  Bottom Layer w0.5: v1(33.147,76.327) 33.147,72.771 v1(35.306,70.612)
NetBMIC1_5: BMIC1.5 RPROG.2 | length 5.2
  Top Layer w0.5: BMIC1.5 32.612,69.774 32.846,70.008 RPROG.2
NetC9_2: C9.2 R11.1 RST.2 | length 70
  Top Layer w0.254: v1(13.208,46.99) 15.788,46.99 R11.1 15.794,43.375 15.943,43.226 21.542,43.226 24.03,45.714 C9.2 ; v1(22.479,86.868) 23.271,87.66 23.271,91.929 RST.2
  Bottom Layer w0.254: v1(13.208,46.99) 13.208,47.742 11.18,49.77 11.18,53.939 15.403,58.162 19.935,58.162 22.733,60.96 22.733,73.754 22.479,74.008 v1(22.479,86.868)
NetESP32-S3_8: ESP32-S3.8 SW2.2 | length 21.5
  Top Layer w0.254: SW2.2 5.974,44.499 12.914,51.439 17.867,51.439 18.108,51.68 ESP32-S3.8
NetESP32-S3_9: ESP32-S3.9 SW3.2 | length 26.6
  Top Layer w0.254: SW3.2 2.609,38.53 2.882,38.803 2.882,40.033 5.947,43.098 5.947,43.753 13.125,50.931 19.137,50.931 19.378,51.172 ESP32-S3.9
NetESP32-S3_10: ESP32-S3.10 SW4.1 | length 35
  Top Layer w0.254: SW4.1 4.113,32.815 6.604,35.306 6.604,43.692 12.435,49.523 13.212,49.523 13.882,48.853 18.711,48.853 18.816,48.853 19.311,49.28 19.681,49.65 20.648,50.685 ESP32-S3.10
NetESP32-S3_11: ESP32-S3.11 SW5.1 | length 59
  Top Layer w0.254: ESP32-S3.11 22.098,54.422 v1(22.098,56.007) ; v1(23.622,74.676) 25.27,74.676 25.52,74.926 29.714,74.926 34.417,79.629 36.195,79.629 36.957,80.391 36.957,84.527 40.767,88.337 40.767,96.373 42.75,98.356 SW5.1
  Bottom Layer w0.254: v1(22.098,56.007) 25.269,59.178 25.269,67.184 23.622,68.831 v1(23.622,74.676)
NetESP32-S3_22: ESP32-S3.22 SW1.2 | length 34.8
  Top Layer w0.254: SW1.2 11.147,50.39 v1(12.954,52.197) ; v1(24.127,64.64) 24.13,64.643 24.758,64.643 24.885,64.77 26.851,64.77 ESP32-S3.22
  Bottom Layer w0.254: v1(12.954,52.197) 13.335,52.578 13.335,55.375 15.614,57.654 20.951,57.654 24.257,60.96 24.257,62.36 24.127,62.49 v1(24.127,64.64)
NetLD1_1: LD1.1 R1.1 | length 8.1
  Top Layer w0.254: R1.1 18.124,92.029 19.821,93.726 22.987,93.726 23.368,94.107 LD1.1
NetLD2_1: LD2.1 R2.1 | length 6.6
  Top Layer w0.254: R2.1 15.838,92.029 16.894,93.085 17.873,93.085 LD2.1
NetLD3_1: LD3.1 R8.1 | length 8.4
  Top Layer w0.254: R8.1 8.301,94.026 12.573,98.298 LD3.1
NetLD3_2: LD3.2 R7.1 | length 5.8
  Top Layer w0.254: R7.1 10.841,95.042 12.573,96.774 LD3.2
NetLD3_3: LD3.3 R6.1 | length 3.7
  Top Layer w0.254: LD3.3@12.573,95.25 LD3.3@12.719,95.25 ; LD3.3 LD3.3@12.719,95.25 ; R6.1 12.954,92.242 12.954,95.015 LD3.3@12.719,95.25
NetNPN1_1: NPN1.1 R5.2 | length 7.9
  Top Layer w0.5: NPN1.1 32.546,58.486 33.755,57.277 35.899,57.277 38.01,59.388 38.36,59.388 38.56,59.588 R5.2
NetNPN1_2: NPN1.2 R4.1 | length 4.3
  Top Layer w0.5: NPN1.2 33.696,60.386 34.984,61.674 35.66,61.674 35.86,61.874 R4.1
NetR12_2: R12.2 TF1.2 | length 10.6
  Top Layer w0.254: R12.2 40.126,39.364 v1(40.386,39.624)
  Bottom Layer w0.254: v1(40.386,39.624) 41.9,41.138 TF1.2
NetR13_2: R13.2 TF1.3 | length 10
  Top Layer w0.254: R13.2 40.38,41.904 v1(40.386,41.91)
  Bottom Layer w0.254: v1(40.386,41.91) 40.453,41.91 40.781,42.238 TF1.3
NetR14_2: R14.2 TF1.5 | length 9.9
  Top Layer w0.254: R14.2 38.688,44.45 v1(40.386,44.45)
  Bottom Layer w0.254: v1(40.386,44.45) 40.392,44.444 48.222,44.444 TF1.5
NetR15_2: R15.2 TF1.7 | length 10.2
  Top Layer w0.254: R15.2 40.507,47.492 v1(40.513,47.498)
  Bottom Layer w0.254: v1(40.513,47.498) 41.373,46.638 TF1.7
NetS1_3: S1.3 T1.2 | length 18.3
  Top Layer w0.5: T1.2 21.773,10.541 20.613,10.541 20.32,10.834 20.32,17.59 20.828,18.098 20.828,25.146 21.203,25.521 S1.3
NetS2_3: S2.3 T2.2 | length 19
  Top Layer w0.5: T2.2 32.316,10.61 31.3,10.61 30.861,11.049 30.861,18.923 32.131,20.193 32.131,25.019 32.887,25.775 S2.3
RGBB: ESP32-S3.21 LD3.6 | length 48.4
  Top Layer w0.25: v1(15.748,98.298) LD3.6 ; v1(20.447,63.5) 26.851,63.5 ESP32-S3.21
  Bottom Layer w0.25: v1(15.748,98.298) 11.811,94.361 11.811,76.454 20.447,67.818 v1(20.447,63.5)
RGBG: ESP32-S3.20 LD3.4 | length 44.6
  Top Layer w0.25: v1(15.748,95.25) LD3.4 ; v1(21.971,62.357) ESP32-S3.20
  Bottom Layer w0.25: v1(15.748,95.25) 12.954,92.456 12.954,77.216 21.971,68.199 v1(21.971,62.357)
RGBR: ESP32-S3.19 LD3.5 | length 48
  Top Layer w0.25: v1(15.748,96.774) LD3.5 ; v1(21.844,61.341) 26.724,61.341 ESP32-S3.19
  Bottom Layer w0.25: v1(15.748,96.774) 12.45,93.476 12.45,76.831 21.209,68.072 21.209,61.487 21.355,61.341 v1(21.844,61.341)
RX: ESP32-S3.36
SCK: ESP32-S3.7 R14.1 S1.5 S2.5 | length 76.4
  Top Layer w0.254: v1(16.77,52.581) 16.77,54.174 ESP32-S3.7 ; v1(34.036,44.831) 34.036,44.069 31.833,41.866 31.833,31.96 29.21,29.337 25.676,29.337 25.527,29.188 25.527,24.638 25.914,24.251 28.69,24.251 28.849,24.411 29.633,24.411 31.242,26.02 31.242,28.575 32.004,29.337 36.449,29.337 38.749,27.037 38.749,24.751 38.985,24.515 39.845,24.515 S2.5 ; v1(35.179,43.434) 35.411,43.666 35.411,44.381 R14.1
  Bottom Layer w0.254: v1(16.77,52.581) 16.77,52.572 18.284,51.058 18.284,46.44 21.036,43.688 32.595,43.688 33.691,44.784 33.989,44.784 v1(34.036,44.831) 34.036,44.577 v1(35.179,43.434)
SCL: ESP32-S3.6 I2C.3 | length 18
  Top Layer w0.25: ESP32-S3.6 15.893,53.917 15.893,52.433 16.123,52.203 v1@16.123,52.194
  Bottom Layer w0.25: v1(16.123,52.194) 16.123,47.886 18.282,45.727 18.282,44.245 I2C.3
SDA: ESP32-S3.5 I2C.2 | length 23
  Top Layer w0.25: ESP32-S3.5 14.298,53.012 v1(15.24,52.07)
  Bottom Layer w0.25: v1(15.24,52.07) 15.24,48.056 17.778,45.518 17.778,44.036 21.759,40.055 21.759,39.074 22.565,38.268 24.601,38.268 I2C.2
TX: ESP32-S3.37
USB_D_N: C10.1 ESD1.1 ESP32-S3.13 USB1.2 | length 55.9
  Top Layer w0.381: ESP32-S3.13 24.833,53.867 24.833,53.298 25.527,52.604 25.527,51.807 25.899,51.435 28.702,51.435 v1@28.702,50.803 ; C10.1 28.702,49.684 v1@28.702,50.803 ; v1(28.578,50.803) v1@28.702,50.803 ; ESD1.1 30.922,80.838 30.988,80.772 31.908,80.772 v1@32.191,81.055 ; v1(32.134,81.293) 32.134,81.325 32.26,81.45 32.26,82.222 32.191,82.291 32.191,83.762 33.265,84.836 35.56,84.836 36.322,85.598 36.322,87.415 34.445,87.415 USB1.2
  Bottom Layer w0.381: v1(28.578,50.803) 28.67,50.895 28.67,77.828 v1(32.134,81.293)
USB_D_P: C11.1 ESD1.6 ESP32-S3.14 USB1.3 | length 58.1
  Top Layer w0.381: ESP32-S3.14 25.728,53.302 26.162,52.867 26.162,52.07 28.965,52.07 29.337,51.698 v1@29.337,50.868 ; v1(29.397,50.927) v1@29.337,50.868 ; C11.1 30.589,48.904 30.471,48.904 29.337,50.038 v1@29.337,50.868 ; ESD1.6 30.922,80.071 30.988,80.137 32.171,80.137 32.997,80.963 32.997,81.257 v1(33.02,81.28) 33.02,81.312 32.895,81.438 32.895,82.485 32.826,82.554 32.826,83.499 33.528,84.201 35.823,84.201 36.957,85.335 36.957,87.678 36.585,88.05 34.445,88.05 USB1.3
  Bottom Layer w0.381: v1(29.397,50.927) 29.305,51.019 29.305,77.481 33.02,81.196 v1(33.02,81.28)
pads on no net: "3.7 LI-ION ONLY." ESD1.3 ESD1.4 ESP32-S3.16 ESP32-S3.24 ESP32-S3.25 ESP32-S3.26 ESP32-S3.27 ESP32-S3.28 ESP32-S3.29 ESP32-S3.30 ESP32-S3.31 ESP32-S3.32 ESP32-S3.33 ESP32-S3.34 ESP32-S3.35 ESP32-S3.41_10 ESP32-S3.41_11 ESP32-S3.41_12 ESP32-S3.41_13 ESP32-S3.41_14 ESP32-S3.41_15 ESP32-S3.41_16 ESP32-S3.41_17 ESP32-S3.41_18 ESP32-S3.41_19 ESP32-S3.41_20 ESP32-S3.41_21 I2C. LDO1.4 S1.8 S2.8 T1.1 T1.3 T2.1 T2.3 TF1.1 TF1.8 TF1.CD1 TF1.MH1 TF1.MH2 TF1.MP1 TF1.MP2 TF1.MP3 TF1.MP4 USB1.Shell

## Polygon pours and split planes (outlines as drawn)
no net on Bottom Layer "NONET_L02_P000" (solid, pour order 0): -2.286,101.473 -2.286,-8.255 -5.842,-11.811 74.549,-11.811 74.549,104.648 75.819,105.918
3V3 on Top Layer "3V3_L01_P001" (solid, pour order 1): -4.191,107.315 -7.62,103.886 -7.62,-12.954 73.66,-12.954 76.2,-10.414 76.2,104.013

## Keep-outs
Keep-Out Layer:
  lines w0.254: 45,1 ccw(c45,21) 65,21 ; 45.01,1 20,1 cw(c20,21) 0,21 0,52.07 7.62,52.07 7.62,73.66 0,73.66 0,81 cw(c20,81) 20,101 45,101 cw(c45,81) 65,81 ; 65.024,21.024 65.024,29.21 65.024,30.48 ccw(c63.754,30.48) 63.754,31.75 62.23,31.75 cw(c62.23,33.02) 60.96,33.02 60.96,48.26 cw(c62.23,48.26) 62.23,49.53 63.754,49.53 ccw(c63.754,50.8) 65.024,50.8 65.024,52.07 65.024,80.976

## Other copper
Top Layer:
  pour cut-out: 7.62,73.533 7.747,73.66 28.448,73.66 28.448,53.213 28.067,52.832 7.747,52.832
Bottom Layer:
  pour cut-out: 7.62,73.66 14.478,73.66 14.097,73.279 14.097,53.34 7.874,53.34 7.747,53.467

## Silkscreen, mask and mechanical layers (free items; w line width, h text height)
Top Overlay:
  text "(+)(+)(+)>>>" at 64.262,68.58 h1.52 r90
  text "(+)" at 12.446,19.812 h1.52
Bottom Overlay:
  drawing of 36 lines, arcs and shapes, not listed
  text "S/N:" at 50.145,81.915 h5 r90
  text "[DESIGNED BY AMIRUL AMIN-IIUM]" at 59.831,79.756 h1.5 r90
  text "QUANTUM SAILS MALAYSIA" at 56.446,77.724 h1.5 r90
  text "A.A. REV1 7/23" at 54.219,76.835 h2.5 r90
  text "WIRELESS SENSORS" at 58.017,74.803 h1.5 r90

## Text inside footprints (layer, text, board x,y; h text height)
ESP32-S3: Top 3D Body "ANTENNA" at 4.978,58.492 h1.5 r90